# EAGLE board MIC2250-1YD5-TR_breakout (EAGLE 8.5.1)
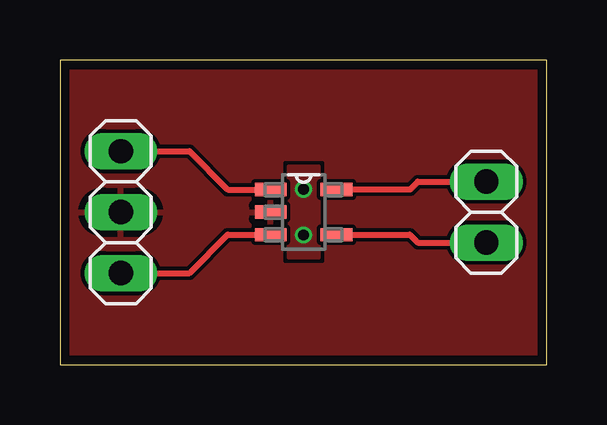
[diagram p0: board, top side]
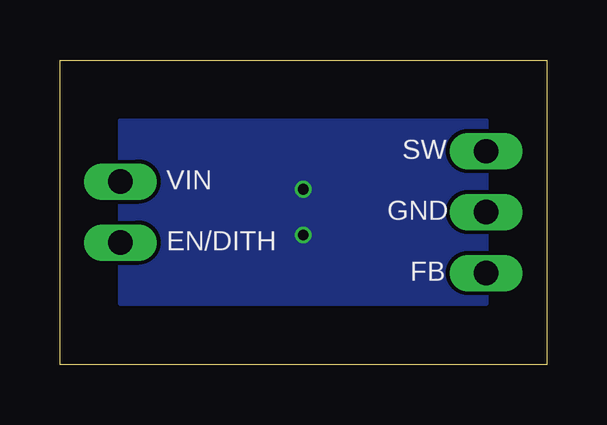
[diagram p1: board, bottom side, seen from below]

Size 20.31 x 12.69 mm. Coordinates in mm from the lower left corner, seen from the top.
Outline: 0,0 20.31,0 20.31,12.69 0,12.69 0,0
Copper layers (1*16): Top 0.035559375mm / dielectric 1.6mm / Bottom 0.035559375mm
Design rules "oshpark-2layer": minimum track width 6mil, minimum drill 10mil, track to track 6mil, track to pad 6mil, pad to pad 6mil, via to via 6mil, smd to smd 6mil, copper to edge 15mil, drill to drill 6mil, minimum pad ring 5mil, minimum via ring 5mil, stop-mask expansion 2.5mil, vias tented up to drill 0mil, thermal gap 10mil

## Footprints (pad centres in the part's own frame; a part is rotated, then mirrored left to right if it is on the bottom)
1X03 = drill 1.016 long: 1 -2.54,0; 2 0,0; 3 2.54,0
1X02 = drill 1.016 long: 1 -1.27,0; 2 1.27,0
SOT95P270X145-5N = smd 1.321 x 0.559: 1 -1.372,0.94; 2 -1.372,0; 3 -1.372,-0.94; 4 1.372,-0.94; 5 1.372,0.94

## Placement (x,y rotation side)
JP1  [1X03]  2.54,6.35 270 top
JP2  [1X02]  17.78,6.35 90 top
U1  MIC2250  [SOT95P270X145-5N]  10.16,6.35 0 top

## Library data of the parts
JP1 JP2 = pinhead
U1 = MIC2250; DESCR: IC REG BOOST ADJ 0.9A SOT23-5; MF: MICROCHIP; PACKAGE: SC-74A, SOT-753

## Nets
EN/DITH: JP2.1 U1.4
FB: JP1.3 U1.3
GND: JP1.2 U1.2
SW: JP1.1 U1.1
VIN: JP2.2 U1.5

## Tracks (layer width: path | path; a pad name or v marks a point on that pad's centre or on a via)
EN/DITH
  Top 0.254: U1.4 14.59,5.41 14.92,5.08 JP2.1
FB
  Top 0.254: JP1.3 5.4,3.81 7,5.41 U1.3
GND
  pour Top (rank 2): 0,0 0,12.7 20.32,12.7 20.32,0
HEAT  (via drill 0.45)
  other vias: 10.16,7.3 10.16,5.4
  pour Top: 9.53,8.26 9.53,4.45 10.79,4.45 10.79,8.26
  pour Bottom: 2.54,2.54 17.78,2.54 17.78,10.16 2.54,10.16
SW
  Top 0.254: JP1.1 5.4,8.89 7,7.29 U1.1
VIN
  Top 0.254: U1.5 11.54,7.3 14.61,7.3 14.92,7.62 JP2.2

## Text on the board
bPlace: SW | VIN | GND | EN/DITH | FB